# Altium PCB Voltage detect.PcbDoc
Units mm, origin at the board's own origin, x right, y up, seen from the top; angles counter-clockwise.
Board outline 74.5 x 38 mm, 2 copper layers (Top Layer, Bottom Layer); 33 components, 29 nets, 90 pads, 4 vias.
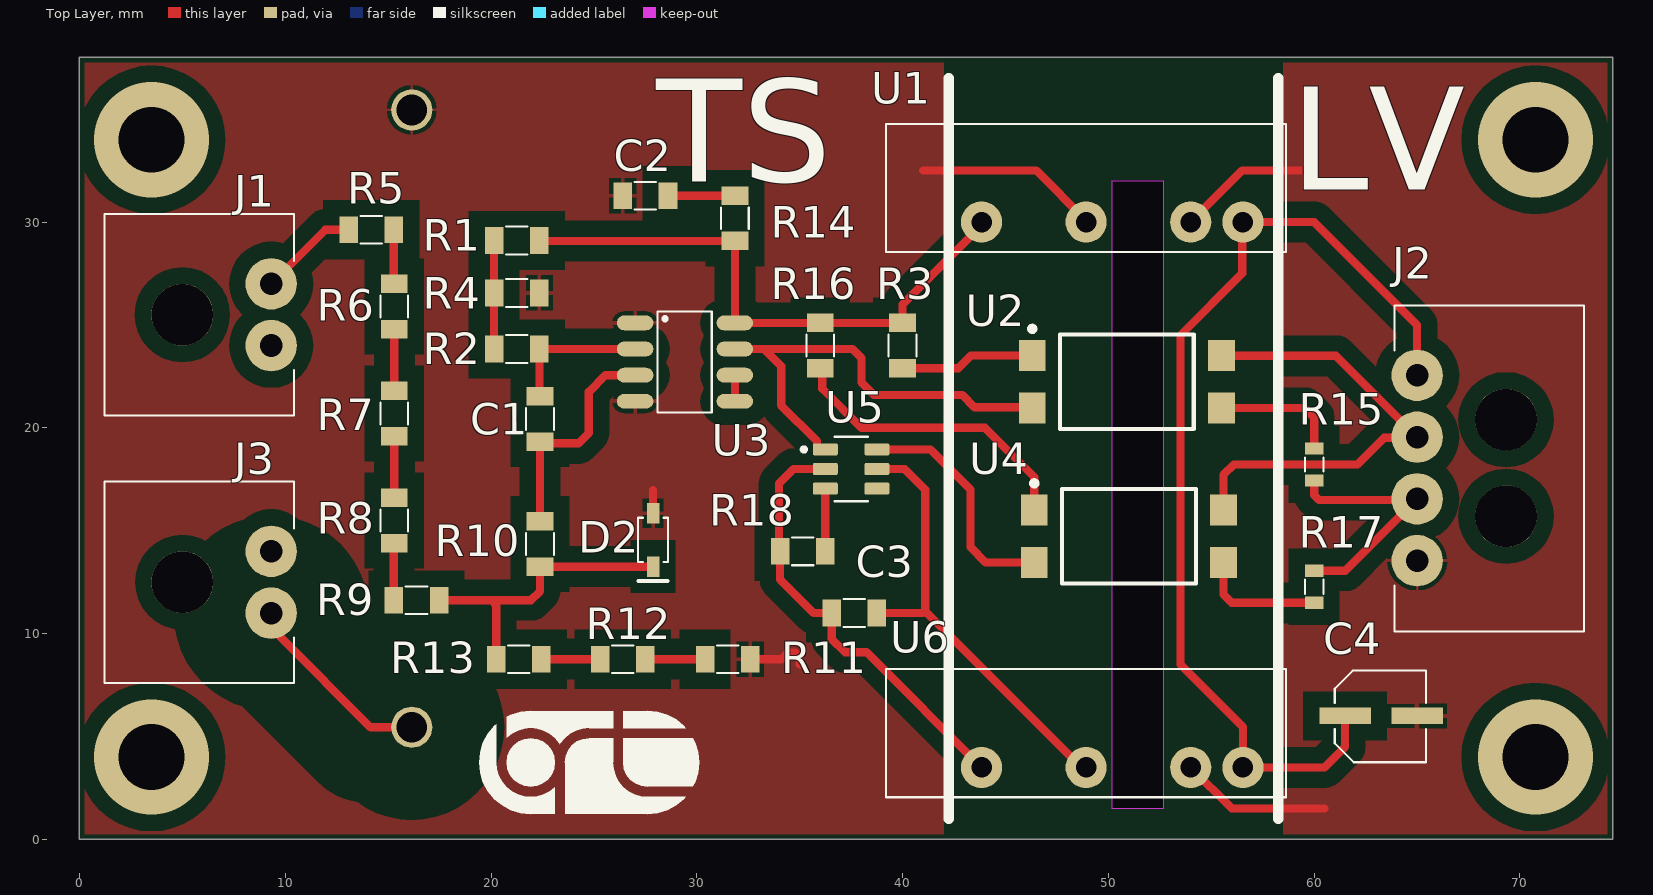
[diagram p0: Top Layer view]
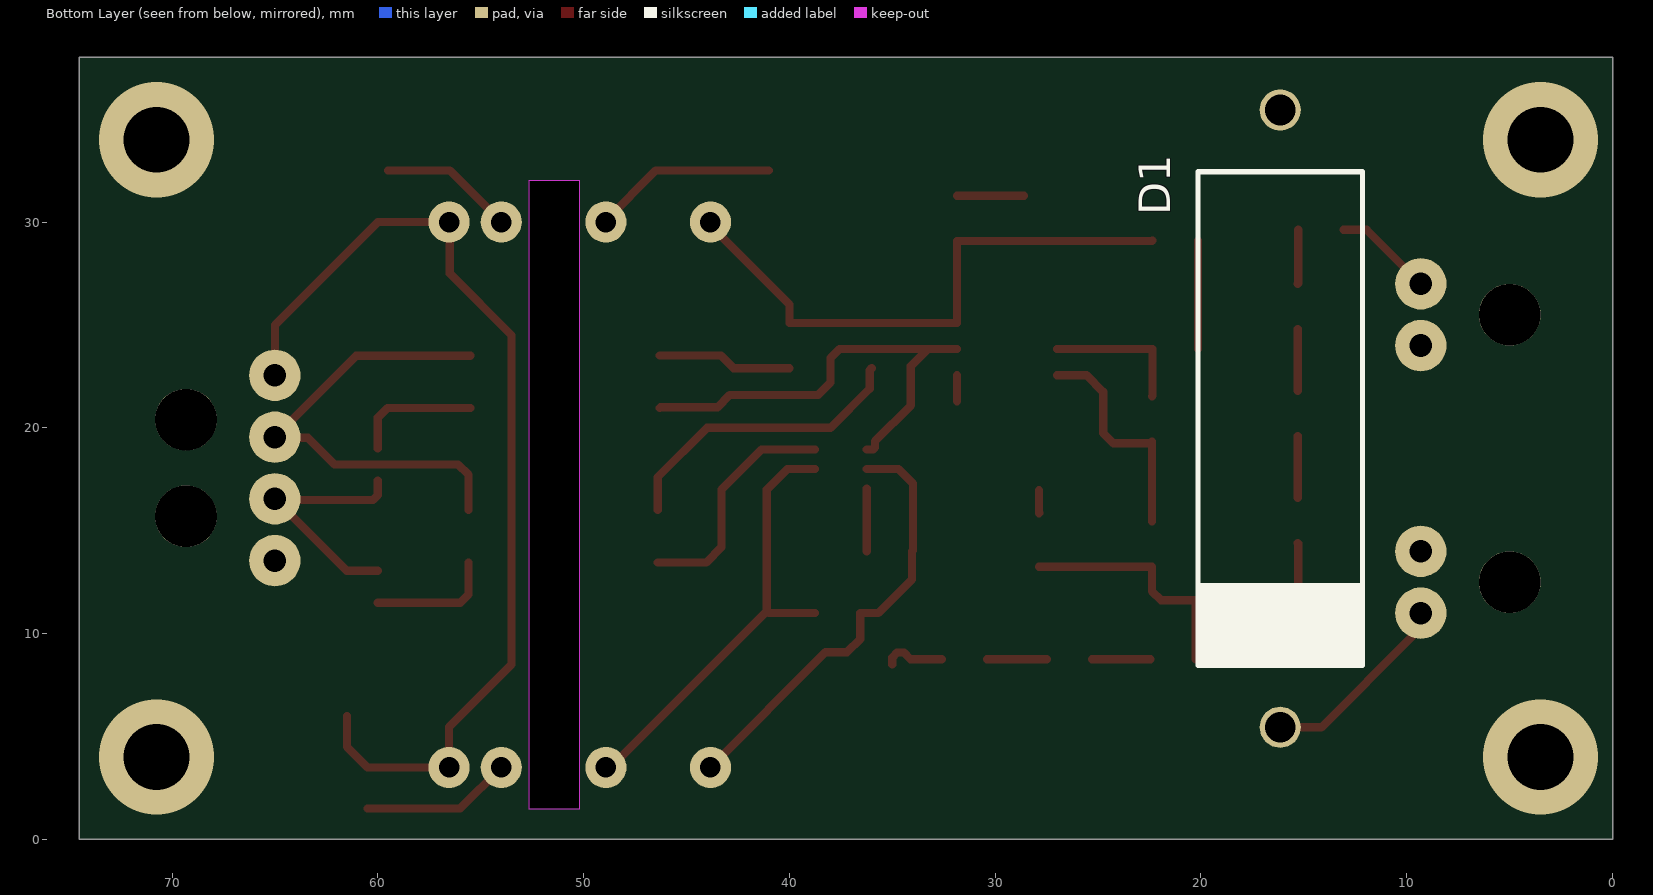
[diagram p1: Bottom Layer view, seen from below]

## Layer stack, top to bottom
Top Solder: solder mask 0.0102, Solder Resist, Dk 3.5
Top Layer: signal copper 0.0356
Dielectric 1: dielectric 0.32, FR-4, Dk 4.8
Bottom Layer: signal copper 0.0356
Bottom Solder: solder mask 0.0102, Solder Resist, Dk 3.5

## Board outline
0,0 0,38 74.5,38 74.5,0
cut-out: 50.2,32 52.675,32 52.675,1.5 50.2,1.5

## Design rules (kind name [scope] priority, off if disabled: settings)
AcuteAngle [All] p1: minimum=3.50000000000000E+0001 checktracksonly=FALSE
BoardOutlineClearance "BoardOutlineClearance 1" [All] p1: gap=0.25 ignorepadtopadclearanceinfootprint=FALSE except(0: Arc-SplitContinuation Track-CutoutEdge Track-SplitContinuation SMDPad-SplitContinuation THPad-SplitContinuation Via-SplitContinuation Fill-SplitContinuation Poly-SplitContinuation Region-SplitContinuation Text-SplitContinuation) // Milling
Clearance Clearance_HV- [InNet('HV-') vs InNet('GND')] p1: gap=0.125 ignorepadtopadclearanceinfootprint=FALSE except(0.2: Arc-Fill Track-Fill SMDPad-SMDPad SMDPad-Fill THPad-Fill Via-Fill Fill-Fill Poly-Region Poly-Text; 0.25: Arc-Hole Track-Hole SMDPad-Hole THPad-Hole Via-Hole Fill-Hole Poly-Hole Region-Hole Text-Hole; 0.8: Arc-Poly SMDPad-Poly Fill-Poly Poly-Poly; 3.5: Track-Poly THPad-Poly Via-Poly)
Clearance Clearance_HV [InNetClass('HV_Connection') vs InNet('GND')] p2: gap=0.125 ignorepadtopadclearanceinfootprint=FALSE except(0.2: Arc-Fill Track-Fill SMDPad-SMDPad SMDPad-Fill THPad-Fill Via-Fill Fill-Fill Fill-Poly Poly-Poly Poly-Region Poly-Text; 0.25: Arc-Hole Track-Hole SMDPad-Hole THPad-Hole Via-Hole Fill-Hole Poly-Hole Region-Hole Text-Hole; 0.5: Track-Track; 0.8: SMDPad-Poly THPad-Poly; 3.5: Arc-Poly Track-Poly Via-Poly)
Clearance "Clearance-1 1/2 Oz" [All] p3: gap=0.125 ignorepadtopadclearanceinfootprint=FALSE except(0.2: Arc-Fill Track-Fill SMDPad-SMDPad SMDPad-Fill THPad-Fill Via-Fill Fill-Fill Fill-Poly Poly-Poly Poly-Region Poly-Text; 0.25: Arc-Hole Track-Hole SMDPad-Hole THPad-Hole Via-Hole Fill-Hole Poly-Hole Region-Hole Text-Hole; 0.8: Arc-Poly Track-Poly SMDPad-Poly THPad-Poly Via-Poly) // Standart
ComponentClearance [All] p1: gap=0.1 collisioncheckmode=3 verticalgap=0.1 showdistances=FALSE
DiffPairsRouting "DiffPairsRouting 1/2 Oz" [All] p1: maxlimit=0.254 minlimit=0.125 mostfreqgap=0.254 toplayer_minwidth=0.125 toplayer_maxwidth=0.381 toplayer_prefwidth=0.381 bottomlayer_minwidth=0.125 bottomlayer_maxwidth=0.381 bottomlayer_prefwidth=0.381 maxuncoupledlength=12.7
HoleSize "Minimum HoleSize" [IsPad] p1: absolutevalues=TRUE maxlimit=5.9 minlimit=0.6 maxpercent=80.000 minpercent=20.000
HoleSize "Minimum HoleSize VIA 1" [IsVia] p2: absolutevalues=TRUE maxlimit=5.9 minlimit=0.3 maxpercent=80.000 minpercent=20.000 // Standart
HoleToHoleClearance Hole2HoleClearance [All] p1: gap=0.25 allowstackedmicrovias=FALSE
MinimumAnnularRing "Minimum AR VIA Standart" [All] p1: minimumring=0.15
MinimumAnnularRing "Minimum AR PAD Standart" [All] p2: minimumring=0.2
MinimumSolderMaskSliver "SolderMask Bridge Standart" [All] p1: minsoldermaskwidth=0.15 // All Masks
PlaneClearance "PlaneClearance-1 1/2 Oz" [All] p1: clearance=0.2 // Standart
PlaneConnect "TermalConnect-1 1/2 Oz" [All] p1: planeconnectstyle=Relief reliefexpansion=0.2 reliefentries=4 reliefconductorwidth=0.2 reliefairgap=0.2 // Standart
PolygonConnect "PolygonConnect-1 1/2 Oz" [All] p1: thpad.connectstyle=Relief thpad.reliefconductorwidth=0.15 thpad.reliefentries=4 thpad.polygonreliefangle="90 Angle" thpad.airgapwidth=0.2 smdpad.connectstyle=Relief smdpad.reliefconductorwidth=0.2 smdpad.reliefentries=4 smdpad.polygonreliefangle="90 Angle" smdpad.airgapwidth=0.2 via.connectstyle=Direct via.reliefconductorwidth=0.254 via.reliefentries=4 via.polygonreliefangle="90 Angle" via.airgapwidth=0.254 // Standart
RoutingCorners [All] p1 off: cornerstyle=45-Degree minsetback=2.54 maxsetback=2.54
RoutingVias [All] p1: holewidth=0.4 width=0.8 viastyle="Through Hole" minholewidth=0.3 minwidth=0.6 maxholewidth=5.9 maxwidth=8.9
SilkToSilkClearance Silk2SilkClearance [All] p1 off: silktosilkclearance=0.15
SilkToSolderMaskClearance Silk2SolderMaskClearance [IsPad] p1 off: minsilkscreentomaskgap=0.15 clearancetoexposedcopper=TRUE
SolderMaskExpansion SolderMaskExpansion-1 [All] p1: expansion=0.05 istentingtop=FALSE // Standart
UnRoutedNet [All] p1: checkbadconnections=TRUE
Width "Width 1/2 Oz" [All] p1: maxlimit=10 minlimit=0.4 preferedwidth=0.4 minimp=50.000000 maximp=50.000000 favimp=50.000000 checkconnectedcopper=TRUE
19 further rules are at their usual default settings.

## Components (designator, comment, footprint, x,y, rotation, side; value= is the part's Value field where it differs from the comment)
C1 "10nF" "0805 Capicator" 22.375,20.431 r90 top
C2 "0.1uF" "0805 Capicator" 27.5,31.281 r180 top
C3 "0.1uF" "0805 Capicator" 37.655,11 r0 top
C4 "4.7uF" "Bar Cap 4x5.4" 65,6 r270 top
D1 "Diode" BY12 15.896,21.085 r270 bottom
D2 "Zener 12V" sod-323 27.875,15.856 r270 top
J1 "Conn2x1" "MolexMicroFit 2x1" 9.32,27 r270 top
J2 "Conn4x1" "MolexMicroFit 4x1" 65.005,22.55 r90 top
J3 "Conn2x1" "MolexMicroFit 2x1" 9.32,14 r270 top
R1 "75K" "0805 Resistor" 21.25,29.106 r180 top
R2 "100R" "0805 Resistor" 21.25,23.831 r0 top
R3 "100R" "0805 Resistor" 40,24 r90 top
R4 "24K" "0805 Resistor" 21.25,26.556 r180 top
R5 "200K" "0805 Resistor" 14.175,29.625 r0 top
R6 "200K" "0805 Resistor" 15.3,25.9 r270 top
R7 "200K" "0805 Resistor" 15.3,20.7 r270 top
R8 "200K" "0805 Resistor" 15.3,15.5 r270 top
R9 "200K" "0805 Resistor" 16.375,11.625 r0 top
R10 "100R" "0805 Resistor" 22.375,14.356 r90 top
R11 "2k4" "0805 Resistor" 31.5,8.756 r180 top
R12 "24K" "0805 Resistor" 26.4,8.756 r0 top
R13 "24K" "0805 Resistor" 21.35,8.756 r180 top
R14 "1k" "0805 Resistor" 31.85,30.181 r90 top
R15 "1k" "0603 Resistor" 60,18.22 r270 top
R16 "100R" "0805 Resistor" 36,24 r90 top
R17 "2k" "0603 Resistor" 60,12.28 r90 top
R18 "1k" "0805 Resistor" 35.145,14 r180 top
U1 "DC/DC" SIP7#1 47.65,31.27 r270 top
U2 "Opt" FAIR-MDIP-4_V 50.9,22.24 r0 top
U3 "Comparator" SO-8 27,25.101 r0 top
U4 "Opt" FAIR-MDIP-4_V 51,14.733 r0 top
U5 "Inv" SOT236 37.5,18 r0 top
U6 "DC/DC" SIP7#2 56.54,3.5 r270 top

## Footprints (in the part's own frame and the unit in brackets; to place one, negate y for a bottom-side part, rotate by r counter-clockwise, add the part's x,y. Pads: shape width x height; smd on the part's side, far side on the other; paste and mask are expansions set on the pad)
"0603 Resistor" [mm]
  rect 0.6x0.9 smd: 1(-0.78,0) 2(0.78,0)
  silkscreen extent -0.35,-0.45 0.35,0.45, body extent -0.85,-0.45 0.85,0.45, height 0.55
"0805 Capicator" [mm]
  rect 0.9x1.3 smd: 1(-1.1,0) 2(1.1,0)
  silkscreen extent -0.52,-0.68 0.53,0.67, body extent -1.05,-0.67 1.05,0.68, height 0.75
"0805 Resistor" [mm]
  rect 0.9x1.3 smd: 1(-1.1,0) 2(1.1,0)
  silkscreen extent -0.53,-0.68 0.52,0.67, body extent -1.05,-0.67 1.05,0.68, height 0.6
"Bar Cap 4x5.4" [mm]
  rect 0.8x2.5 smd: 1(0,0) 2(0,-3.5)
  silkscreen extent -2.2,-4 2.25,0.43, body extent -2.15,-4.3 2.15,0.7, height 5.4
BY12 [mm]
  round 2 hole 1.5: 1(-14.365,-0.254) 2(15.635,-0.254)
  silkscreen extent -11.36,-4.25 12.63,3.75
FAIR-MDIP-4_V [mm]
  rect 1.3x1.5 smd: 1(-4.6,1.27) 2(-4.6,-1.27) 3(4.6,-1.27) 4(4.6,1.27)
  silkscreen extent -4.72,-2.3 3.25,2.69, body extent -5.08,-2.3 5.08,2.3, height 3.85
"MolexMicroFit 2x1" [mm]
  round 2.5 hole 1.1: 1(3,0) 2(0,0)
  round 3 hole 3: A(1.5,-4.32)
  silkscreen extent -3.4,-8.1 6.4,1.1, body extent -3.33,-8.9 6.33,1, height 5.64
"MolexMicroFit 4x1" [mm]
  round 2.5 hole 1.1: 1(0,0) 2(-3,0) 3(-6,0) 4(-9,0)
  round 3 hole 3: A(-6.85,-4.32) A(-2.15,-4.32)
  silkscreen extent -12.45,-8.1 3.4,1.1, body extent -12.35,-8.87 3.3,1.03, height 5.64
SIP7#1 [mm]
  round 2 hole 1: 1(1.27,8.89) 2(1.27,6.35) 4(1.27,1.27) 6(1.27,-3.81)
  silkscreen extent -3.5,-8.46 2.72,10.99, body extent -3.43,-8.38 2.66,10.92, height 10.16
SIP7#2 [mm]
  round 2 hole 1: 1(0,0) 2(0,-2.54) 4(0,-7.62) 6(0,-12.7)
  silkscreen extent -4.77,-17.35 1.45,2.1, body extent -4.7,-17.27 1.39,2.03, height 10.16
SO-8 [mm]
  oval 1.78x0.72 smd: 1(0,0) 2(0,-1.27) 3(0,-2.54) 4(0,-3.81) 5(4.85,-3.81) 6(4.85,-2.54) 7(4.85,-1.27) 8(4.85,0)
  silkscreen extent 1.1,-4.35 3.73,0.55, body extent -0.45,-4.35 5.33,0.55, height 1.45
sod-323 [mm]
  rect 1x0.6 smd: 1(0,0) 2(2.6,0)
  silkscreen extent 0.22,-0.73 3.3,0.72, body extent 0.03,-0.68 2.63,0.67, height 1.1
SOT236 [mm]
  rrect25% 1.21x0.58 smd: 1(-1.255,0.95) 2(-1.255,0) 3(-1.255,-0.95) 4(1.255,-0.95) 5(1.255,0) 6(1.255,0.95)
  silkscreen extent -2.4,-1.56 0.8,1.56, body extent -1.4,-1.45 1.4,1.45, height 1.45

## Part data
C1: library part "Cap 10nF (0805)", "0805 X7R 10nF 100V 10%", Manufacturer="Murata Manufacturing", Part Number=GRM21BR72A103KA01L, ComponentLink1Description=Chip&Dip, ComponentLink1URL=https://www.chipdip.ru/product/grm21br72a103ka01l, Type=Capacitor
C2: library part "Cap 0.1uF (0805)", "0.1uF X7R 50V 10% 0805", Manufacturer="Murata Manufacturing", Part Number=GRM21BR71H104K, ComponentLink1Description=Chip&Dip, ComponentLink1URL=https://www.chipdip.ru/product/grm21br71h104k, Type=Capacitor
C3: library part "Cap 0.1uF (0805)", "0.1uF X7R 50V 10% 0805", Manufacturer="Murata Manufacturing", Part Number=GRM21BR71E104KA01L, ComponentLink1Description=Chip&Dip, ComponentLink1URL=https://www.chipdip.ru/product/grm21br71e104ka01l, Type=Capacitor
C4: library part "Cap Pol 4.7uF", "ECAP SMD,  35V, 105°C", Manufacturer=Epcos, Part Number=B41121A7475M000, ComponentLink1Description=Chip&Dip, ComponentLink1URL=https://www.chipdip.ru/product/b41121a7475m000, Type=Capacitor
D1: library part BY12, "BY12 - Highg voltage diode", ComponentLink1Description=ChipDip, ComponentLink1URL=https://www.chipdip.ru/product/by12, ComponentLink2Description=Datasheet, ComponentLink2URL=https://static.chipdip.ru/lib/508/DOC001508556.pdf
D2: library part "Zener Diode 12V", "300mW", Manufacturer="NXP Semiconductor", Part Number=BZX384-C12,115, ComponentLink1Description=Chip&Dip, ComponentLink1URL=https://www.chipdip.ru/product/bzx384-c12.115, ComponentLink2Description=DataSheet, ComponentLink2URL=https://static.chipdip.ru/lib/583/DOC001583013.pdf, Type=Diode
J1 J3: library part "Conn2x1 [MicroFit]", "Micro-Fit 3.0 Right-Angle Header, 3.00mm Pitch, Single Row, 2 Circuits, with Snap-in Plastic Peg PCB Lock, Tin, Glow-Wire Capable, Black", Manufacturer=Molex, Part Number=436500200, ComponentLink1Description=Molex, ComponentLink1URL=https://www.molex.com/molex/products/part-detail/pcb_headers/0436500200, Type=Connector
J2: library part "Conn4x1 [MicroFit]", "Micro-Fit 3.0 Right-Angle Header, 3.00mm Pitch, Single Row, 4 Circuits, with Snap-in Plastic Peg PCB Lock, Tin, Glow-Wire Capable, Black", Manufacturer=Molex, Part Number=436500400, ComponentLink1Description=Molex, ComponentLink1URL=https://www.molex.com/molex/products/part-detail/pcb_headers/0436500400, Type=Connector
R1: library part "Res 75K (0805)", "0.125W 0805 75K, 1%", Manufacturer=Taiwan, Part Number=RC0805FR-0775KL, ComponentLink1Description=Chip&Dip, ComponentLink1URL=https://www.chipdip.ru/product0/9000079535, Type=Resistor
R2 R3 R10 R16: library part "Res 100R (0805)", "0.125W 0805 100R, 1%", Manufacturer=Taiwan, Part Number=RC0805FR-07100RL, ComponentLink1Description=Chip&Dip, ComponentLink1URL=https://www.chipdip.ru/product0/9000079462, Type=Resistor
R4 R12 R13: library part "Res 24K (0805)", "0.125W 0805 24K, 1%", Manufacturer=Taiwan, Part Number=RC0805FR-0724KL, ComponentLink1Description=Chip&Dip, ComponentLink1URL=https://www.chipdip.ru/product0/9000079523, Type=Resistor
R5 R6 R7 R8 R9: library part "Res 200K (0805)", "0.125W 0805 200K, 1%", Manufacturer=Taiwan, Part Number=RC0805FK-07200KL, ComponentLink1Description=Chip&Dip, ComponentLink1URL=https://www.chipdip.ru/product0/914213016, Type=Resistor
R11: library part "Res 2.4k (0805)", "0.125W 0805 2.4k, 1%", Manufacturer=Taiwan, Part Number=RC0805FR-072K4L, ComponentLink1Description=Chip&Dip, ComponentLink1URL=https://www.chipdip.ru/product0/9000079495, Type=Resistor
R14 R18: library part "Res 1k (0805)", "0.125W 0805 1k, 1%", Manufacturer=Taiwan, Part Number=RC0805FR-071KL, ComponentLink1Description=Chip&Dip, ComponentLink1URL=https://www.chipdip.ru/product0/9000079486, Type=Resistor
R15: library part "Res 1k (0603)", "0.1W 0603 1k, 1%", Manufacturer=Taiwan, Part Number=RC0603FR-071KL, ComponentLink1Description=Chip&Dip, ComponentLink1URL=https://www.chipdip.ru/product0/9000079676, Type=Resistor
R17: library part "Res 2k (0603)", "0.1W 0603 2k, 1%", Manufacturer=Taiwan, Part Number=RC0603FR-072KL, ComponentLink1Description=Chip&Dip, ComponentLink1URL=https://www.chipdip.ru/product0/9000079719, Type=Resistor
U1: library part "DC/DC Isolated [TMH]", "The TMH series are ultra miniature, isolated 2 Watt DC/DC-converters in a Single-in-Line  package  (SIP)", ComponentLink1Description=Chip&Dip, ComponentLink1URL=https://www.chipdip.ru/product/tmh-1205s, ComponentLink2Description="New link", ComponentLink2URL=https://static.chipdip.ru/lib/005/DOC001005854.pdf
U2 U4: library part "Optocoupler [FOD817B]", "Phototransistor Optocoupler, 4 us Rise, 3 us Fall, 5000 Vrms, -55 to 110 degC, 4-Pin MDIP, RoHS, Tape and Reel", Manufacturer="ON Semiconductor", Part Nomber=FOD817B, ComponentLink1Description=CHIPDIP, ComponentLink1URL=https://www.chipdip.ru/product/fod817b, ComponentLink2Description=Datasheet, ComponentLink2URL=https://static.chipdip.ru/lib/297/DOC000297284.pdf
U3: library part "Comparator [LM3]", "Differential comparator with strobes", Manufacturer="Texas Instruments", Part Number=LM311DR, ComponentLink1Description=DataSheet, ComponentLink1URL=https://static.chipdip.ru/lib/222/DOC000222396.pdf, ComponentLink2Description=Chip&Dip, ComponentLink2URL=https://www.chipdip.ru/product/lm311d, Type=IC
U5: library part Inverter, Chip&Dip=https://www.chipdip.ru/product/sn74lvc2g04dbvr-2
U6: library part "DC/DC Isolated 5V [TMH]", "The TMH series are ultra miniature, isolated 2 Watt DC/DC-converters in a Single-in-Line  package  (SIP)", Manufacturer="Traco Power", Part Number=TMH2405S, ComponentLink1Description=Chip&Dip, ComponentLink1URL=https://www.chipdip.ru/product/tmh-2405s, ComponentLink2Description=DataSheet, ComponentLink2URL=https://static.chipdip.ru/lib/005/DOC001005854.pdf, Type=IC

## Via types
v1: diameter 5.6, hole 3.2, Top Layer to Bottom Layer, 4 vias

## Nets (pads, with @x,y where several pads share a name; then routed paths per layer and width w, separated by ;. In a path a pad name is that pad's centre, name@x,y a point inside that pad or via, vN(x,y) a via of type N, cw(c..) or ccw(c..) an arc to the next point about the centre after c; other vN are vias at no path point)
5V: C3.1 R18.2 U5.2 U6.6 | length 21.5
  Top Layer w0.4: U5.2 34.7,18 34,17.3 34,14.045 R18.2 34.045,12.632 35.678,11 C3.1 36.555,9.745 37.2,9.1 38.24,9.1 U6.6
12V: R1.1 R3.2 R14.1 R16.2 U1.6 U3.8 | length 28.1
  Top Layer w0.4: R1.1 22.375,29.081 R14.1 U3.8 ; U3.8 R16.2 ; R16.2 R3.2 40,26 43.84,29.84 U1.6
"24V IN": C4.2 J2.1 U1.1 U6.1 | length 48.4
  Top Layer w0.4: U1.1@56.54,29.5 56.5,29.46 56.5,27.5 53.5,24.5 53.5,8.5 56.54,5.46 U6.1 60.5,3.5 61.5,4.5 C4.2 ; U1.1 60,30 65,25 65,22.555 J2.1
"DC/DC GND": C4.1 J2.4 U1.2 U6.2 | length 13.9
  Top Layer w0.4: U6.2 56,1.5 60.5,1.5 ; U1.2 56.5,32.5 59.5,32.5
GND: C2.2 D1.1 D2.1 R4.1 R11.1 U1.4 U3.1 U3.4 | length 13.2
  Top Layer w0.4: D2.1@27.863,15.869 D2.1 27.875,16.968 ; R11.1 34.112,8.756 34.434,9.079 34.766,9.079 35,8.845 35,8.5 ; 41,32.5 46.5,32.5 48.92,30.08 U1.4 ; U1.4@48.92,29.5 U1.4@48.92,29.58
HV+: J1.2 R5.1 | length 4.8
  Top Layer w0.4: J1.2 11.945,29.625 R5.1
HV-: D1.2 J3.1 | length 9.6
  Top Layer w0.4: J3.1 9.722,10.598 9.722,9.878 14.15,5.45 D1.2
LV_GND: C3.2 U5.5 U6.4 | length 22
  Top Layer w0.4: C3.2 41,11 41.1,11.1 ; U5.5 40.1,18 41.1,17 41.1,11.1 ; U6.4 48.7,3.5 41.1,11.1
NetC1_1: C1.1 R10.2 U3.3 | length 11.1
  Top Layer w0.4: R10.2 C1.1 22.456,19.25 24.25,19.25 24.75,19.75 24.75,21.75 25.561,22.561 U3.3
NetC1_2: C1.2 R2.2 U3.2 | length 7
  Top Layer w0.4: C1.2 22.35,21.556 R2.2 U3.2
NetC2_1: C2.1 R14.2 | length 3.2
  Top Layer w0.4: C2.1 R14.2
NetD2_2: D2.2 R9.2 R10.1 R13.2 | length 14.7
  Top Layer w0.4: R9.2 20.016,11.625 ; R13.2 20.25,11.391 20.016,11.625 ; D2.2 R10.1 22.375,12.059 21.941,11.625 20.016,11.625
NetR1_2: R1.2 R2.1 R4.2 | length 5.3
  Top Layer w0.4: R2.1 R4.2 R1.2
NetR3_1: R3.1 U2.1 | length 6.6
  Top Layer w0.4: R3.1 42.72,22.9 43.33,23.51 U2.1
NetR5_2: R5.2 R6.1 | length 2.6
  Top Layer w0.4: R5.2 15.275,27.025 R6.1
NetR6_2: R6.2 R7.1 | length 3
  Top Layer w0.4: R7.1 R6.2
NetR7_2: R7.2 R8.1 | length 3
  Top Layer w0.4: R8.1 R7.2
NetR8_2: R8.2 R9.1 | length 2.8
  Top Layer w0.4: R9.1 15.275,14.375 R8.2
NetR11_2: R11.2 R12.2 | length 2.9
  Top Layer w0.4: R12.2 R11.2
NetR12_1: R12.1 R13.1 | length 2.9
  Top Layer w0.4: R13.1 R12.1
NetR15_1: R15.1 U2.3 | length 6.2
  Top Layer w0.4: U2.3 59.53,20.97 60,20.5 R15.1
NetR16_1: R16.1 U4.1 | length 14.7
  Top Layer w0.4: R16.1 36.1,22.8 36.1,21.9 38,20 44,20 46.4,17.6 U4.1
NetR17_1: R17.1 U4.3 | length 6.1
  Top Layer w0.4: U4.3 55.6,11.9 56,11.5 R17.1
NetR18_1: R18.1 U5.3 | length 3.1
  Top Layer w0.4: R18.1 U5.3
NetU2_2: U2.2 U3.7 U5.1 | length 22.6
  Top Layer w0.4: U3.7 33.269,23.831 ; U5.1 35.93,18.95 35.84,19.04 35.84,19.355 34.1,21.095 34.1,23 33.269,23.831 ; U2.2 46.27,21 43.5,21 42.9,21.6 38.6,21.6 38,22.2 38,23.4 37.569,23.831 33.269,23.831
NetU3_5: U3.5 U3.6 | length 1.3
  Top Layer w0.4: U3.5 U3.6
NetU4_2: U4.2 U5.6 | length 11.6
  Top Layer w0.4: U5.6 41.35,18.95 43.3,17 43.3,14.2 44.037,13.463 U4.2
Sgn_In: J2.2 U2.4 U4.4 | length 23
  Top Layer w0.4: U2.4 55.51,23.5 61.055,23.5 J2.2 64.969,19.514 63.389,19.514 62.1,18.225 56.1,18.225 55.6,17.725 U4.4
Sgn_Out: J2.3 R15.2 R17.2 | length 12.2
  Top Layer w0.4: R17.2 61.515,13.06 J2.3@64.955,16.5 ; R15.2 60,16.734 60.234,16.5 J2.3@64.955,16.5 ; J2.3 J2.3@64.955,16.5
pads on no net: J1.1 J1.A J2.A J3.2 J3.A U5.4
copper on no net:
  other v1: 3.5,4 70.75,4 3.5,34 70.75,34

## Polygon pours and split planes (outlines as drawn)
"DC/DC GND" on Top Layer "NONET_L-01_P-001" (solid, pour order 3): 58.5,39.006 76,39.006 76,-1.294 58.5,-1.294
GND on Top Layer "NONET_L-01_P-001" (solid, remove dead copper, pour order 7): 0,-1.025 0,41.55 42,41.55 42,-1.025

## Silkscreen, mask and mechanical layers (free items; w line width, h text height)
Top Overlay:
  region: 22.235,4.878 22.519,4.76 22.763,4.573 22.95,4.329 23.067,4.045 23.107,3.741 23.067,3.436 22.95,3.153 22.763,2.909 22.519,2.722 22.235,2.604 21.931,2.564 21.626,2.604 21.342,2.722 21.099,2.909 20.912,3.153 20.794,3.436 20.754,3.741 20.794,4.045 20.912,4.329 21.099,4.573 21.342,4.76 21.626,4.878 21.931,4.918
  region: 25.931,6.241 25.931,5.408 24.764,5.408 24.764,5.416 24.437,5.383 24.123,5.288 23.834,5.133 23.58,4.925 23.371,4.671 23.347,4.626 23.323,4.671 23.115,4.925 22.861,5.133 22.571,5.288 22.257,5.383 21.931,5.416 21.604,5.383 21.29,5.288 21,5.133 20.759,4.936 20.764,5.952 20.969,6.062 21.441,6.205 21.931,6.253
  region: 20.264,3.741 20.256,3.741 20.288,3.414 20.383,3.1 20.538,2.81 20.746,2.557 21,2.348 21.29,2.194 21.604,2.098 21.931,2.066 22.257,2.098 22.571,2.194 22.861,2.348 23.102,2.546 23.097,1.241 21.931,1.241 21.931,1.229 21.441,1.277 20.969,1.42 20.535,1.652 20.154,1.965 19.842,2.345 19.61,2.78 19.467,3.251 19.419,3.741 19.467,4.231 19.61,4.702 19.842,5.137 20.154,5.517 20.262,5.606
  region: 29.918,4.702 30.061,4.231 30.109,3.741 30.061,3.251 29.918,2.78 29.808,2.574 27.597,2.574 27.597,2.564 27.293,2.604 27.009,2.722 26.765,2.909 26.578,3.153 26.461,3.436 26.421,3.741 26.431,4.908 29.808,4.908
  region: 28.087,6.205 28.559,6.062 28.993,5.83 29.374,5.517 29.462,5.409 26.431,5.408 26.431,6.241 27.597,6.241 27.597,6.253
  region: 25.931,4.908 25.931,3.741 25.923,3.741 25.955,3.414 26.05,3.1 26.205,2.81 26.413,2.557 26.667,2.348 26.956,2.194 27.271,2.098 27.597,2.066 29.461,2.074 29.462,2.073 29.374,1.965 28.993,1.652 28.559,1.42 28.087,1.277 27.597,1.229 23.597,1.241 23.597,3.741 23.587,3.741 23.627,4.045 23.745,4.329 23.932,4.573 24.176,4.76 24.459,4.878 24.764,4.918
  lines w0.5: 42.25,1 42.25,37 ; 58.25,1 58.25,37
  text "TS" at 28.025,31.956 h5
  text "LV" at 58.85,31.575 h5
Mechanical 1:
  the board outline again, w0.254
Mechanical 15:
  lines w0.254: 120.25,-34.5 127.75,-34.5